# Allegro board PiMod_MOT_R0A V0.2.brd
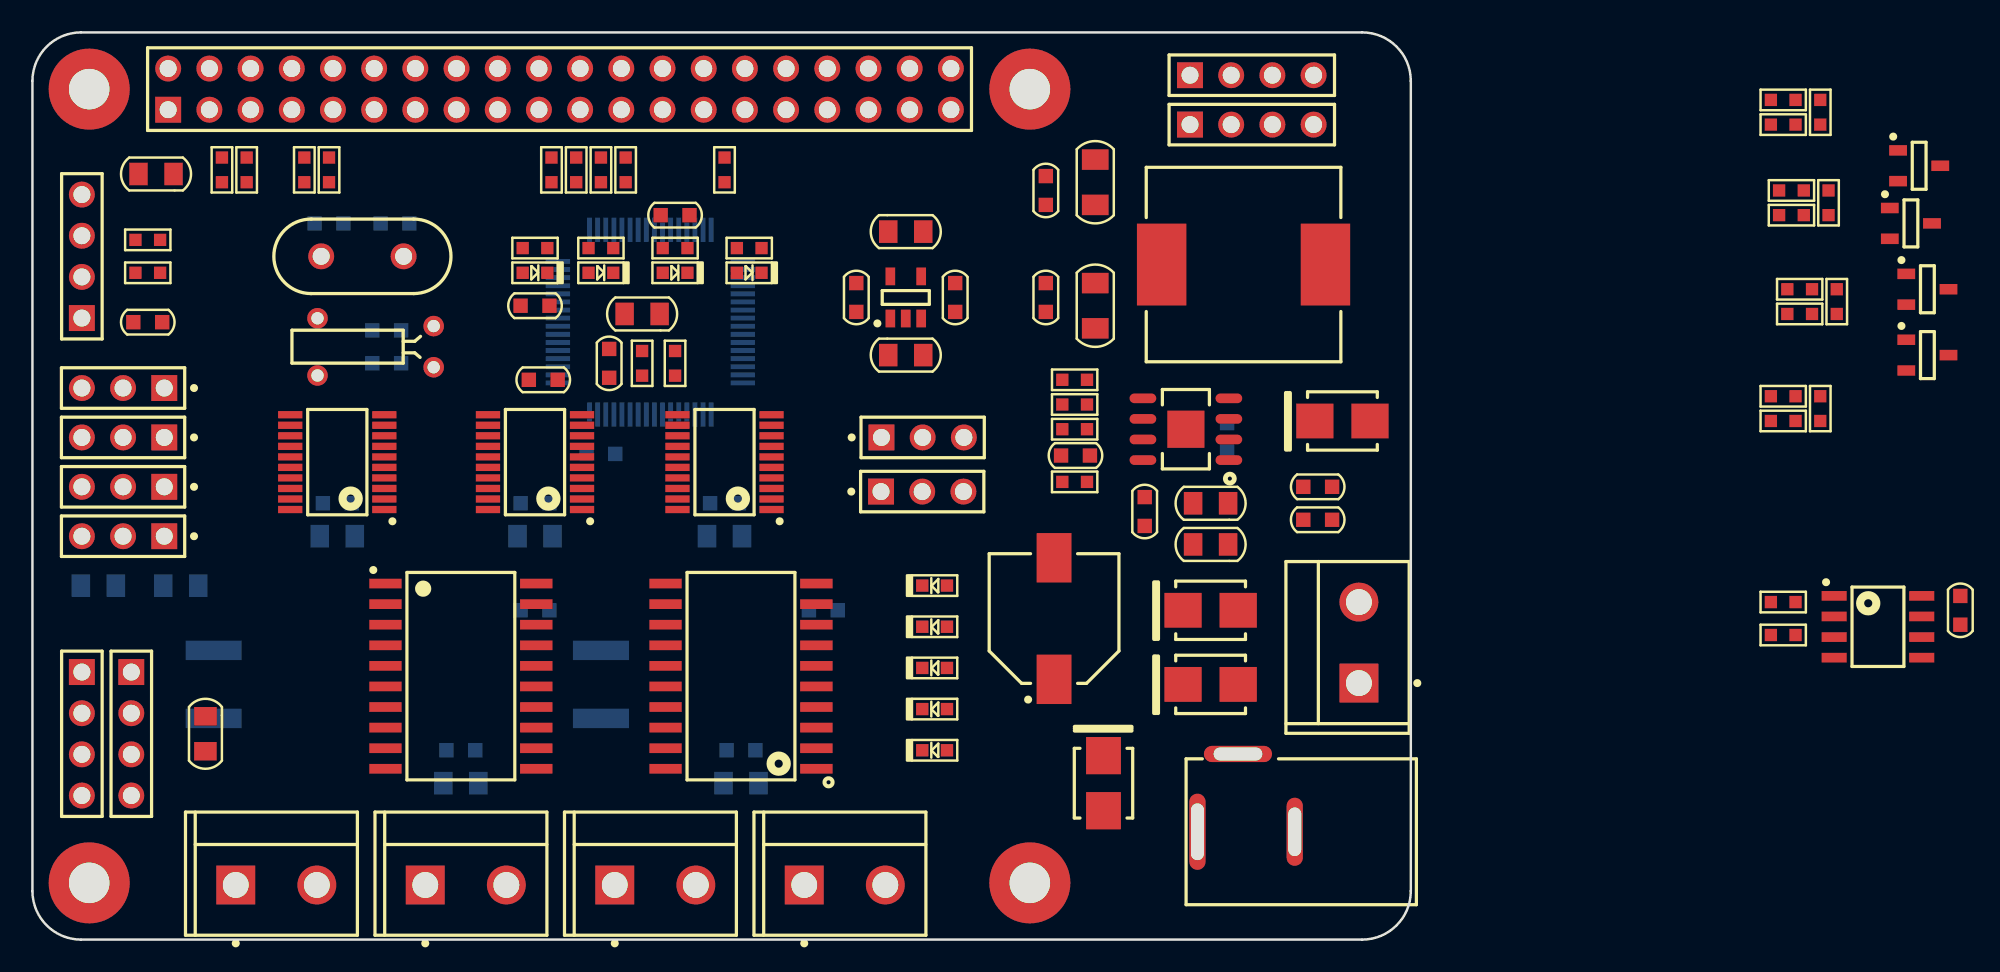
[diagram p0: board, top side]
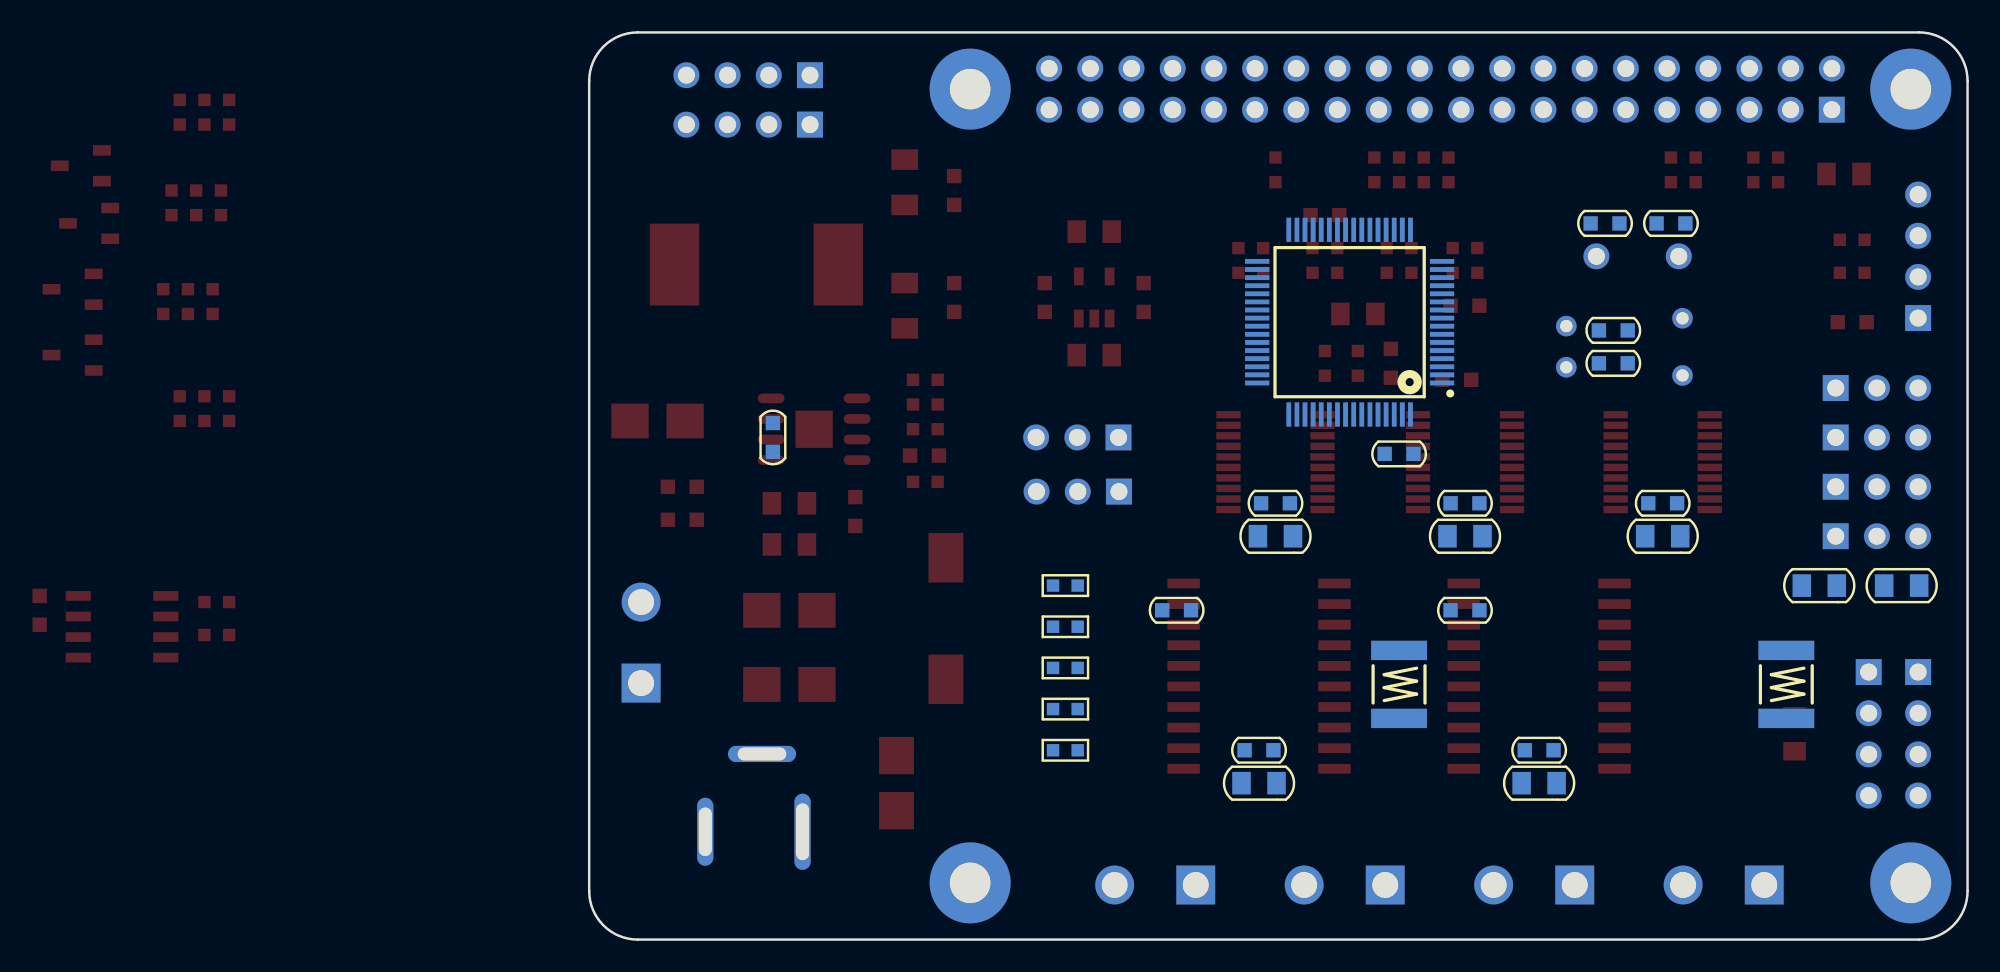
[diagram p1: board, bottom side, seen from below]

Outline 84.99 x 55.98 mm; copper layers: TOP, L2_GND, L3_PWR, BOTTOM. Coordinates in mm from the lower left corner of the outline.
Outline path: 0,52.98 0,3 arc(0.88,0.88) 3,0 81.99,0 arc(84.11,0.88) 84.99,3 84.99,52.98 arc(84.11,55.1) 81.99,55.98 3,55.98 arc(0.88,55.1) 0,52.98

## Placement (name value [footprint] x y rotation side)
BT1  BATTERY  [KF301_2P]  81.79 20.83 180 top
C1  22pF NC  [C0603]  21.84 35.56 90 bottom
C2  0.1uF NC  [C0603]  118.87 20.32 0 top
C3  10uF  [C0805]  37.59 38.61 270 top
C4  0.1uF  [C0603]  31.5 34.54 270 top
C5  0.1uF  [C0603]  30.99 39.12 270 top
C6  0.1uF  [C0603]  39.62 44.7 270 top
C7  0.1uF  [C0603]  35.05 29.97 270 bottom
C8  0.1uF  [C0603]  7.11 38.1 90 top
C9  22pF NC  [C0603]  21.84 37.59 90 bottom
C10  22pF  [C0603]  18.29 44.2 270 bottom
C11  0.1uF  [C0603]  35.56 35.56 0 top
C12  22pF  [C0603]  22.35 44.2 90 bottom
C13  10uF  [C0805]  30.99 24.89 270 bottom
C14  10uF  [C0805]  18.8 24.89 270 bottom
C15  10uF  [C0805]  42.67 24.89 270 bottom
C16  0.1uF  [C0603]  30.99 26.92 270 bottom
C17  0.1uF  [C0603]  42.67 26.92 270 bottom
C18  0.1uF  [C0603]  18.8 26.92 270 bottom
C19  10uF  [C0805]  43.69 9.65 270 bottom
C20  10uF  [C0805]  26.42 9.65 270 bottom
C21  0.1uF  [C0603]  30.99 20.32 90 bottom
C22  0.1uF  [C0603]  26.42 11.68 270 bottom
C23  0.1uF  [C0603]  43.69 11.68 270 bottom
C24  0.1uF  [C0603]  48.77 20.32 270 bottom
C25  10uF  [C0805]  9.14 21.84 270 bottom
C26  10uF  [C0805]  4.06 21.84 90 bottom
C31  0.1uF  [C0603]  73.66 30.99 180 bottom
C32  10uF  [C0805]  72.64 26.92 270 top
C33  10uF  [C0805]  72.64 24.38 270 top
C34  0.1uF  [C0603]  79.25 25.91 90 top
C35  0.1uF  [C0603]  79.25 27.94 90 top
C36  0.1uF  [C0603]  68.58 26.42 180 top
C37  1.5nF  [C0603]  64.31 29.87 90 top
C38  22uF  [C1206]  65.53 46.74 180 top
C39  22uF  [C1206]  65.53 39.12 0 top
C40  0.1uF  [C0603]  62.48 46.23 180 top
C41  0.1uF  [C0603]  62.48 39.62 0 top
C42  330uF NC  [CAP8X8H10]  62.99 19.81 90 top
C43  10uF  [C0805]  53.85 36.07 90 top
C44  10uF  [C0805]  53.85 43.69 90 top
C45  0.1uF  [C0603]  50.8 39.62 0 top
C46  0.1uF  [C0603]  56.9 39.62 0 top
C47  10uF  [C0805]  10.67 12.7 0 top
C48  10uF  [C0805]  7.62 47.24 270 top
D1  BAT54S  [SOT23]  116.33 47.75 0 top
D2  BAT54S  [SOT23]  116.84 40.13 0 top
D3  BAT54S  [SOT23]  115.82 44.2 0 top
D4  BAT54S  [SOT23]  116.84 36.07 0 top
D5  SS54  [DO214AA_SMB]  80.77 32 0 top
D6  SS54  [DO214AA_SMB]  66.04 9.65 270 top
D7  SMBJ18CA  [DO214AA_SMB]  72.64 20.32 0 top
D8  SS54  [DO214AA_SMB]  72.64 15.75 0 top
F1  8V 2.6A  [FUSE1812]  35.05 15.75 90 bottom
F2  8V 2.6A  [FUSE1812]  11.18 15.75 90 bottom
J1  RPI CON  [SIP20X2]  8.37 51.21 0 top
J2  SWD_CON  [SIP4]  3.05 38.35 90 top
J3  MCU_USART1  [SIP3]  52.32 27.65 0 top
J4  MCU_USART2  [SIP3]  52.35 30.99 0 top
J5  MOTOR_CON  [KF301_2P]  52.59 3.37 90 top
J6  SERVO_MOT_360D  [SIP3]  8.13 34.04 180 top
J7  SERVO_MOT_180D  [SIP3]  8.13 30.99 180 top
J8  MOTOR_CON  [KF301_2P]  40.9 3.37 90 top
J9  SERVO_MOT_360D  [SIP3]  8.13 27.94 180 top
J10  SERVO_MOT_180D  [SIP3]  8.13 24.89 180 top
J11  MOTOR_CON  [KF301_2P]  17.54 3.37 90 top
J12  MOTOR_CON  [KF301_2P]  29.22 3.37 90 top
J13  ULTRA_SOUND  [SIP4]  71.37 53.34 0 top
J14  ULTRA_SOUND  [SIP4]  3.05 16.51 270 top
J15  SPEED_MON  [SIP4]  71.37 50.29 0 top
J16  SPEED_MON  [SIP4]  6.1 16.51 270 top
L1  6.8uH  [CD127]  74.68 41.66 180 top
LD1  BLUE  [LED0603]  30.23 41.15 0 top
LD2  BLUE  [LED0603]  34.29 41.15 0 top
LD3  BLUE  [LED0603]  38.86 41.15 0 top
LD4  BLUE  [LED0603]  43.43 41.15 0 top
LD5  RED  [LED0603]  56.39 21.84 180 top
LD6  RED  [LED0603]  56.39 19.3 180 top
LD7  RED  [LED0603]  56.39 16.76 180 top
LD8  RED  [LED0603]  56.39 14.22 180 top
LD9  RED  [LED0603]  56.39 11.68 180 top
P1  DC_JACK_5  [DC005]  77.83 6.65 180 top
R1  0R  [R0603]  18.29 48.26 270 top
R2  0R  [R0603]  36.58 48.26 270 top
R3  0R  [R0603]  33.53 48.26 270 top
R4  0R  [R0603]  35.05 48.26 270 top
R5  0R  [R0603]  32 48.26 270 top
R6  0R  [R0603]  16.76 48.26 270 top
R7  0R  [R0603]  13.21 48.26 270 top
R8  0R  [R0603]  11.68 48.26 270 top
R9  4.7K  [R0603]  37.59 36.32 270 top
R10  10K NC  [R0603]  107.19 18.8 0 top
R11  4.7K  [R0603]  39.62 34.8 90 top
R12  10K NC  [R0603]  107.19 20.83 0 top
R13  100R  [R0603]  7.87 41.15 180 top
R14  100R  [R0603]  7.87 43.18 180 top
R15  1K  [R0603]  30.23 42.67 0 top
R16  1K  [R0603]  34.29 42.67 0 top
R17  1K  [R0603]  38.86 42.67 0 top
R18  1K  [R0603]  43.43 42.67 0 top
R19  0R  [R0603]  110.24 50.29 90 top
R20  0R  [R0603]  110.74 44.7 90 top
R21  0R  [R0603]  111.25 38.61 90 top
R22  0R  [R0603]  110.24 32 90 top
R23  100K NC  [R0603]  63.5 28.24 0 top
R24  52.3K 1%  [R0603]  65.02 34.54 180 top
R25  30K  [R0603]  65.02 31.5 180 top
R26  10K 1%  [R0603]  63.5 33.02 0 top
R27  10K  [R0603]  56.39 21.84 180 bottom
R28  4.7K  [R0603]  56.39 19.3 180 bottom
R29  1K  [R0603]  56.39 16.76 180 bottom
R30  4.7K  [R0603]  56.39 14.22 180 bottom
R31  4.7K  [R0603]  56.39 11.68 180 bottom
R32  10K  [R0603]  108.71 51.82 180 top
R33  10K  [R0603]  109.22 46.23 180 top
R34  10K  [R0603]  109.73 40.13 180 top
R35  10K  [R0603]  108.71 33.53 180 top
R36  90.9K  [R0603]  107.19 50.29 0 top
R37  90.9K  [R0603]  107.7 44.7 0 top
R38  10K  [R0603]  108.2 38.61 0 top
R39  10K  [R0603]  107.19 32 0 top
R40  0R  [R0603]  42.67 48.26 270 top
TH1  -  [TH2_5]  3.5 3.5 0 top
TH2  -  [TH2_5]  61.5 3.5 0 top
TH3  -  [TH2_5]  3.5 52.48 0 top
TH4  -  [TH2_5]  61.5 52.48 0 top
U1  STM32F030R8  [LQFP64]  38.1 38.1 0 bottom
U2  SN74LVC244APWR  [TSSOP20]  42.67 29.46 180 top
U3  SN74LVC244APWR  [TSSOP20]  30.99 29.46 180 top
U4  SN74LVC244APWR  [TSSOP20]  18.8 29.46 180 top
U5  AT24C02 NC  [SO8]  113.79 19.3 0 top
U6  L293DD  [SO20]  43.69 16.26 180 top
U7  L293DD  [SO20]  26.42 16.26 0 top
U8  RT8251GSP  [SO8_EP]  71.12 31.5 180 top
U9  SPX3819M5L  [SOT23-5]  53.85 39.62 90 top
Y1  32.768KHz NC  [XTAL_32KHZ]  24.74 35.32 90 top
Y2  8MHz  [CYST]  17.81 42.16 0 top

## Library data of the parts
BT1 = BATTERY
C1-C10 C12-C26 C47 C48 = CAP NP
C11 C31-C41 C43-C46 = CAP_CE_0603
C42 = CAP
D1-D4 = BAT54S
D5-D8 = DIODE
F1 F2 = FUSE
J1 = HEADER 20X2
J2 = CON_SWD
J3 J4 = HEADER 3
J5 J8 J11 J12 = CON2
J6 J7 J9 J10 = SERVO_MOT
J13-J16 = HEADER 4
L1 = INDUCTOR
LD1-LD9 = LED
P1 = DC_JACK
R1-R40 = R
TH1-TH4 = THROUGH_HOLE
U1 = STM32F030R8
U2-U4 = SN74LVC244APWR
U5 = AT24C512
U6 U7 = L293DD
U8 = RT8251GSP
U9 = SPX3819M5L
Y1 Y2 = ZTA

## Footprints (pads in the part's own frame, mm; a bottom-side part is the same pattern mirrored in y, then rotated)
C0603
  rect 0.889x0.889 smd: 1(0,0.889) 2(0,-0.889)
C0805
  rect 1.397x1.143 smd: 1(0,1.079) 2(0,-1.079)
C1206
  rect 1.651x1.27 smd: 1(0,1.397) 2(0,-1.397)
CAP8X8H10
  rect 3.05x2.15 smd: 1(-3.75,0) 2(3.75,0)
CD127
  rect 3.05x5.05 smd: 1(-5.05,0) 2(5.05,0)
CYST
  round 1.6 hole 1.05: 1(0,0) 2(5.08,0)
DC005
  oval 1x4.7 hole 0.8x3.5: 1(6,0)
  oval 1x4.2 hole 0.8x3: 2(0,0)
  oval 4.2x1 hole 3x0.8: 3(3.5,-4.8)
DO214AA_SMB
  rect 2.3x2.15 smd: 1(1.7,0) 2(-1.7,0)
FUSE1812
  rect 1.2x3.45 smd: 1(-2.1,0) 2(2.1,0)
KF301_2P
  rect 2.4x2.4 hole 1.6: 1(0,5)
  round 2.4 hole 1.6: 2(0,0)
LED0603
  rect 0.762x0.762 smd: 1(0,0) 2(1.524,0)
LQFP64
  rect 1.5x0.3 smd: 1(-5.7,3.75) 2(-5.7,3.25) 3(-5.7,2.75) 4(-5.7,2.25) 5(-5.7,1.75) 6(-5.7,1.25) 7(-5.7,0.75) 8(-5.7,0.25) 9(-5.7,-0.25) 10(-5.7,-0.75) 11(-5.7,-1.25) 12(-5.7,-1.75) 13(-5.7,-2.25) 14(-5.7,-2.75) 15(-5.7,-3.25) 16(-5.7,-3.75) 33(5.7,-3.75) 34(5.7,-3.25) 35(5.7,-2.75) 36(5.7,-2.25) 37(5.7,-1.75) 38(5.7,-1.25) 39(5.7,-0.75) 40(5.7,-0.25) 41(5.7,0.25) 42(5.7,0.75) 43(5.7,1.25) 44(5.7,1.75) 45(5.7,2.25) 46(5.7,2.75) 47(5.7,3.25) 48(5.7,3.75)
  rect 0.3x1.5 smd: 17(-3.75,-5.7) 18(-3.25,-5.7) 19(-2.75,-5.7) 20(-2.25,-5.7) 21(-1.75,-5.7) 22(-1.25,-5.7) 23(-0.75,-5.7) 24(-0.25,-5.7) 25(0.25,-5.7) 26(0.75,-5.7) 27(1.25,-5.7) 28(1.75,-5.7) 29(2.25,-5.7) 30(2.75,-5.7) 31(3.25,-5.7) 32(3.75,-5.7) 49(3.75,5.7) 50(3.25,5.7) 51(2.75,5.7) 52(2.25,5.7) 53(1.75,5.7) 54(1.25,5.7) 55(0.75,5.7) 56(0.25,5.7) 57(-0.25,5.7) 58(-0.75,5.7) 59(-1.25,5.7) 60(-1.75,5.7) 61(-2.25,5.7) 62(-2.75,5.7) 63(-3.25,5.7) 64(-3.75,5.7)
R0603
  rect 0.762x0.762 smd: 1(0,0) 2(1.524,0)
SIP3
  rect 1.6x1.6 hole 1.05: 1(0,0)
  round 1.6 hole 1.05: 2(2.54,0) 3(5.08,0)
SIP4
  rect 1.6x1.6 hole 1.05: 1(0,0)
  round 1.6 hole 1.05: 2(2.54,0) 3(5.08,0) 4(7.62,0)
SIP20X2
  rect 1.6x1.6 hole 1.05: 1(0,0)
  round 1.6 hole 1.05: 2(0,2.54) 3(2.54,0) 4(2.54,2.54) 5(5.08,0) 6(5.08,2.54) 7(7.62,0) 8(7.62,2.54) 9(10.16,0) 10(10.16,2.54) 11(12.7,0) 12(12.7,2.54) 13(15.24,0) 14(15.24,2.54) 15(17.78,0) 16(17.78,2.54) 17(20.32,0) 18(20.32,2.54) 19(22.86,0) 20(22.86,2.54) 21(25.4,0) 22(25.4,2.54) 23(27.94,0) 24(27.94,2.54) 25(30.48,0) 26(30.48,2.54) 27(33.02,0) 28(33.02,2.54) 29(35.56,0) 30(35.56,2.54) 31(38.1,0) 32(38.1,2.54) 33(40.64,0) 34(40.64,2.54) 35(43.18,0) 36(43.18,2.54) 37(45.72,0) 38(45.72,2.54) 39(48.26,0) 40(48.26,2.54)
SO8
  rect 1.55x0.6 smd: 1(-2.7,1.905) 2(-2.7,0.635) 3(-2.7,-0.635) 4(-2.7,-1.905) 5(2.7,-1.905) 6(2.7,-0.635) 7(2.7,0.635) 8(2.7,1.905)
SO8_EP
  oval 1.65x0.6 smd: 1(-2.65,1.905) 2(-2.65,0.635) 3(-2.65,-0.635) 4(-2.65,-1.905) 5(2.65,-1.905) 6(2.65,-0.635) 7(2.65,0.635) 8(2.65,1.905)
  rect 2.3x2.3 smd: 9(0,0)
SO20
  rect 2x0.6 smd: 1(-4.65,5.715) 2(-4.65,4.445) 3(-4.65,3.175) 4(-4.65,1.905) 5(-4.65,0.635) 6(-4.65,-0.635) 7(-4.65,-1.905) 8(-4.65,-3.175) 9(-4.65,-4.445) 10(-4.65,-5.715) 11(4.65,-5.715) 12(4.65,-4.445) 13(4.65,-3.175) 14(4.65,-1.905) 15(4.65,-0.635) 16(4.65,0.635) 17(4.65,1.905) 18(4.65,3.175) 19(4.65,4.445) 20(4.65,5.715)
SOT23
  rect 1.1x0.65 smd: 1(-1.3,0.95) 2(-1.3,-0.95) 3(1.3,0)
SOT23-5
  rect 1.1x0.6 smd: 1(-1.3,0.95) 2(-1.3,0) 3(-1.3,-0.95) 4(1.3,-0.95) 5(1.3,0.95)
TH2_5
  round 5 hole 2.5: 1(0,0)
TSSOP20
  rect 1.5x0.45 smd: 1(-2.9,2.925) 2(-2.9,2.275) 3(-2.9,1.625) 4(-2.9,0.975) 5(-2.9,0.325) 6(-2.9,-0.325) 7(-2.9,-0.975) 8(-2.9,-1.625) 9(-2.9,-2.275) 10(-2.9,-2.925) 11(2.9,-2.925) 12(2.9,-2.275) 13(2.9,-1.625) 14(2.9,-0.975) 15(2.9,-0.325) 16(2.9,0.325) 17(2.9,0.975) 18(2.9,1.625) 19(2.9,2.275) 20(2.9,2.925)
XTAL_32KHZ
  round 1.27 hole 0.762: (-0.508,7.163) (3.023,7.163) 1(0,0) 2(2.54,0)

## Nets
GND: BT1.2(-) C1.2 C2.2 C3.2 C4.2 C5.2 C6.2 C7.2 C8.2 C9.2 C10.2 C11.2 C12.2 C13.2 C14.2 C15.2 C16.2 C17.2 C18.2 C19.2 C20.2 C21.2 C22.2 C23.2 C24.2 C25.2 C26.2 C32.2 C33.2 C34.2 C35.2 C36.1 C38.2 C39.2 C40.2 C41.2 C42.2 C43.2 C44.2 C45.2 C46.2 C47.2 C48.2 D1.1 D2.1 D3.1 D4.1 D5.1(A) D7.1(A) J1.6 J1.9 J1.14 J1.20 J1.25 J1.30 J1.34 J1.39 J2.4(GND) J3.3 J4.3 J6.3(GND) J7.3(GND) J9.3(GND) J10.3(GND) J13.4 J14.4 J15.4 J16.4 LD5.2(CATHODE) LD6.2(CATHODE) LD7.2(CATHODE) LD8.2(CATHODE) LD9.2(CATHODE) P1.2(GND1) P1.3(GND2) R11.2 R12.2 R25.1 R26.1 R36.1 R37.1 R38.1 R39.1 U1.12(VSSA) U1.31(VSS#31) U1.63(VSS#63) U2.1(1\O\E\) U2.10(GND) U2.19(2\O\E\) U3.1(1\O\E\) U3.10(GND) U3.19(2\O\E\) U4.1(1\O\E\) U4.10(GND) U4.19(2\O\E\) U5.1(A0) U5.2(A1) U5.4(GND) U6.4(GND#4) U6.5(GND#5) U6.6(GND#6) U6.7(GND#7) U6.14(GND#14) U6.15(GND#15) U6.16(GND#16) U6.17(GND#17) U7.4(GND#4) U7.5(GND#5) U7.6(GND#6) U7.7(GND#7) U7.14(GND#14) U7.15(GND#15) U7.16(GND#16) U7.17(GND#17) U8.4(GND1) U8.9(GND2) U9.2(GND)
VBAT: BT1.1(+) D8.1(A) R32.2
VDD3V3: C2.1 C3.1 C4.1 C5.1 C6.1 C7.1 C8.1 C13.1 C14.1 C15.1 C16.1 C17.1 C18.1 C44.1 C45.1 D1.2 D2.2 D3.2 D4.2 J2.1(VCC) R9.1 R10.1 R15.2 R16.2 R17.2 R18.2 R29.2 R35.2 U1.1(VBAT/VLCD) U1.13(VDDA) U1.32(VDD#32) U1.64(VDD#64) U2.20(VCC) U3.20(VCC) U4.20(VCC) U5.8(VCC) U9.5(VO)
VDD5V: C38.1 C39.1 C40.1 C41.1 C43.1 C47.1 C48.1 F1.1 F2.1 J1.2 J1.4 J13.1 J14.1 J15.3 J16.3 L1.2 R24.2 R28.2 R34.2 U9.1(VIN) U9.3(EN)
VDD12V: C32.1 C33.1 C34.1 C35.1 C42.1 D6.2(K) D7.2(K) D8.2(K) R23.1 R27.2 R33.2 U8.2(VIN)
BOOT0: R9.2 R11.1 U1.60(BOOT0)
FB_5V: R24.1 R26.2 U8.5(FB)
GPIO2: J1.3 R8.1
GPIO3: J1.5 R7.1
GPIO4: J1.7
GPIO5: J1.29
GPIO6: J1.31
GPIO7: J1.26
GPIO8: J1.24 R2.1
GPIO9: J1.21 R4.1
GPIO10: J1.19 R5.1
GPIO11: J1.23 R3.1
GPIO12: J1.32 R40.1
GPIO13: J1.33
GPIO14: J1.8 R6.1
GPIO15: J1.10 R1.1
GPIO16: J1.36
GPIO17: J1.11
GPIO18: J1.12
GPIO19: J1.35
GPIO20: J1.38
GPIO21: J1.40
GPIO22: J1.15 LD3.2(CATHODE)
GPIO23: J1.16 LD2.2(CATHODE)
GPIO24: J1.18
GPIO25: J1.22
GPIO26: J1.37
GPIO27: J1.13 LD1.2(CATHODE)
ID_SC: J1.28 U5.6(SCL)
ID_SD: J1.27 U5.5(SDA)
ID_WP: R10.2 R12.1 U5.7(WP)
MCU_RST#: C11.1 R40.2 U1.7(NRST)
MOT1EN: U2.14(1Y3) U6.1(EN1)
MOT1IN1: U2.18(1Y1) U6.2(IN1)
MOT1IN2: U2.16(1Y2) U6.9(IN2)
MOT1O1: J5.1 U6.3(OUT1)
MOT1O2: J5.2 U6.8(OUT2)
MOT1SPD: J15.1 U4.2(1A1)
MOT2EN: U2.7(2Y2) U6.11(EN2)
MOT2IN1: U2.12(1Y4) U6.12(IN3)
MOT2IN2: U2.9(2Y1) U6.19(IN4)
MOT2O1: J8.1 U6.13(OUT3)
MOT2O2: J8.2 U6.18(OUT4)
MOT2SPD: J15.2 U4.4(1A2)
MOT3EN: U3.18(1Y1) U7.1(EN1)
MOT3IN1: U2.5(2Y3) U7.2(IN1)
MOT3IN2: U2.3(2Y4) U7.9(IN2)
MOT3O1: J11.1 U7.3(OUT1)
MOT3O2: J11.2 U7.8(OUT2)
MOT3SPD: J16.1 U4.6(1A3)
MOT4EN: U3.12(1Y4) U7.11(EN2)
MOT4IN1: U3.16(1Y2) U7.12(IN3)
MOT4IN2: U3.14(1Y3) U7.19(IN4)
MOT4O1: J12.1 U7.13(OUT3)
MOT4O2: J12.2 U7.18(OUT4)
MOT4SPD: J16.2 U4.8(1A4)
PA0: U1.14(PA0)
PA1: U1.15(PA1)
PA2: J4.1 U1.16(PA2)
PA3: J4.2 U1.17(PA3)
PA4: R2.2 U1.20(PA4)
PA5: R3.2 U1.21(PA5)
PA6: R4.2 U1.22(PA6)
PA7: R5.2 U1.23(PA7)
PA8: U1.41(PA8) U4.13(2A2)
PA9: J3.1 R1.2 U1.42(PA9)
PA10: J3.2 R6.2 U1.43(PA10)
PA11: U1.44(PA11) U4.5(2Y3)
PA12: U1.45(PA12) U4.11(2A1)
PA13: R14.1 U1.46(PA13)
PA14: R13.1 U1.49(PA14)
PA15: U1.50(PA15) U4.3(2Y4)
PB0: U1.26(PB0) U3.2(1A1)
PB1: U1.27(PB1) U3.8(1A4)
PB2: U1.28(PB2) U4.18(1Y1)
PB3: U1.55(PB3) U4.16(1Y2)
PB4: U1.56(PB4) U2.6(1A3)
PB5: U1.57(PB5) U2.13(2A2)
PB6: U1.58(PB6) U4.14(1Y3)
PB7: U1.59(PB7) U4.12(1Y4)
PB8: U1.61(PB8) U3.15(2A3)
PB9: U1.62(PB9) U3.17(2A4)
PB10: R7.2 U1.29(PB10)
PB11: R8.2 U1.30(PB11)
PB12: U1.33(PB12)
PB13: U1.34(PB13)
PB14: U1.35(PB14) U3.11(2A1)
PB15: U1.36(PB15) U3.13(2A2)
PC0: D1.3 R19.1 U1.8(PC0)
PC1: D2.3 R20.1 U1.9(PC1)
PC2: D3.3 R21.1 U1.10(PC2)
PC3: D4.3 R22.1 U1.11(PC3)
PC4: U1.24(PC4)
PC5: U1.25(PC5)
PC6: U1.37(PC6) U2.2(1A1)
PC7: U1.38(PC7) U2.4(1A2)
PC8: U1.39(PC8) U2.8(1A4)
PC9: U1.40(PC9) U2.11(2A1)
PC10: U1.51(PC10) U2.15(2A3)
PC11: U1.52(PC11) U2.17(2A4)
PC12: U1.53(PC12) U3.4(1A2)
PC13: U1.2(PC13) U3.6(1A3)
PC14: C1.1 U1.3(PC14/OSC32_IN) Y1.1
PC15: C9.1 U1.4(PC15/OSC32_OUT) Y1.2
PD2: LD4.2(CATHODE) U1.54(PD2)
PF0: C10.1 U1.5(PF0/OSC_IN) Y2.1
PF1: C12.1 U1.6(PF1/OSC_OUT) Y2.2
PF4: U1.18(PF4)
PF5: U1.19(PF5)
PF6: U1.47(PF6)
PF7: U1.48(PF7)
SERVO1: J6.1(CTL) U3.9(2Y1)
SERVO2: J9.1(CTL) U3.7(2Y2)
SERVO3: J7.1(CTL) U3.5(2Y3)
SERVO4: J10.1(CTL) U3.3(2Y4)
SW_5V: C31.1 D5.2(K) L1.1 U8.3(SW)
SWCLK: J2.2(CLK) R13.2
SWDIO: J2.3(DAT) R14.2
US1_ECHO: J13.3 U4.15(2A3)
US1_TRIG: J13.2 U4.9(2Y1)
US2_ECHO: J14.3 U4.17(2A4)
US2_TRIG: J14.2 U4.7(2Y2)
VEXT: D6.1(A) P1.1(VCC)
VMON_3V3: R22.2 R35.1 R39.2
VMON_5V: R21.2 R34.1 R38.2
VMON_12V: R20.2 R33.1 R37.2
VMON_BAT: R19.2 R32.1 R36.2
VMOT: C19.1 C20.1 C21.1 C22.1 C23.1 C24.1 F1.2 R30.2 U6.10(VCC) U6.20(VCCIO) U7.10(VCC) U7.20(VCCIO)
VSRV: C25.1 C26.1 F2.2 J6.2(VCC) J7.2(VCC) J9.2(VCC) J10.2(VCC) R31.2
N1524440: C36.2 U8.8(SS)
N1524472: C31.2 U8.1(BOOT)
N1524524: C37.2 U8.6(COMP)
N1524544: C37.1 R25.2
N1534047: LD1.1(ANODE) R15.1
N1534057: LD2.1(ANODE) R16.1
N1534067: LD3.1(ANODE) R17.1
N1534077: LD4.1(ANODE) R18.1
N1534958: R23.2 U8.7(EN)
N1536928: LD7.1(ANODE) R29.1
N1537106: LD6.1(ANODE) R28.1
N1537194: LD5.1(ANODE) R27.1
N1538971: LD8.1(ANODE) R30.1
N1539104: LD9.1(ANODE) R31.1
N1580615: C46.1 U9.4(BP)

Pads without a net: J1 1 17; TH1 1; TH2 1; TH3 1; TH4 1; U5 3
